# Altium PCB SolarNode.PcbDoc (part 2 of 2)
Units mil, origin at the board's own origin, x right, y up, seen from the top; angles counter-clockwise.
Board outline 7598.43 x 6553.62 mil, 2 copper layers (Top Layer, Bottom Layer); 223 components, 193 nets, 759 pads, 133 vias.
Unrouted connection lines stored in the file: 164.
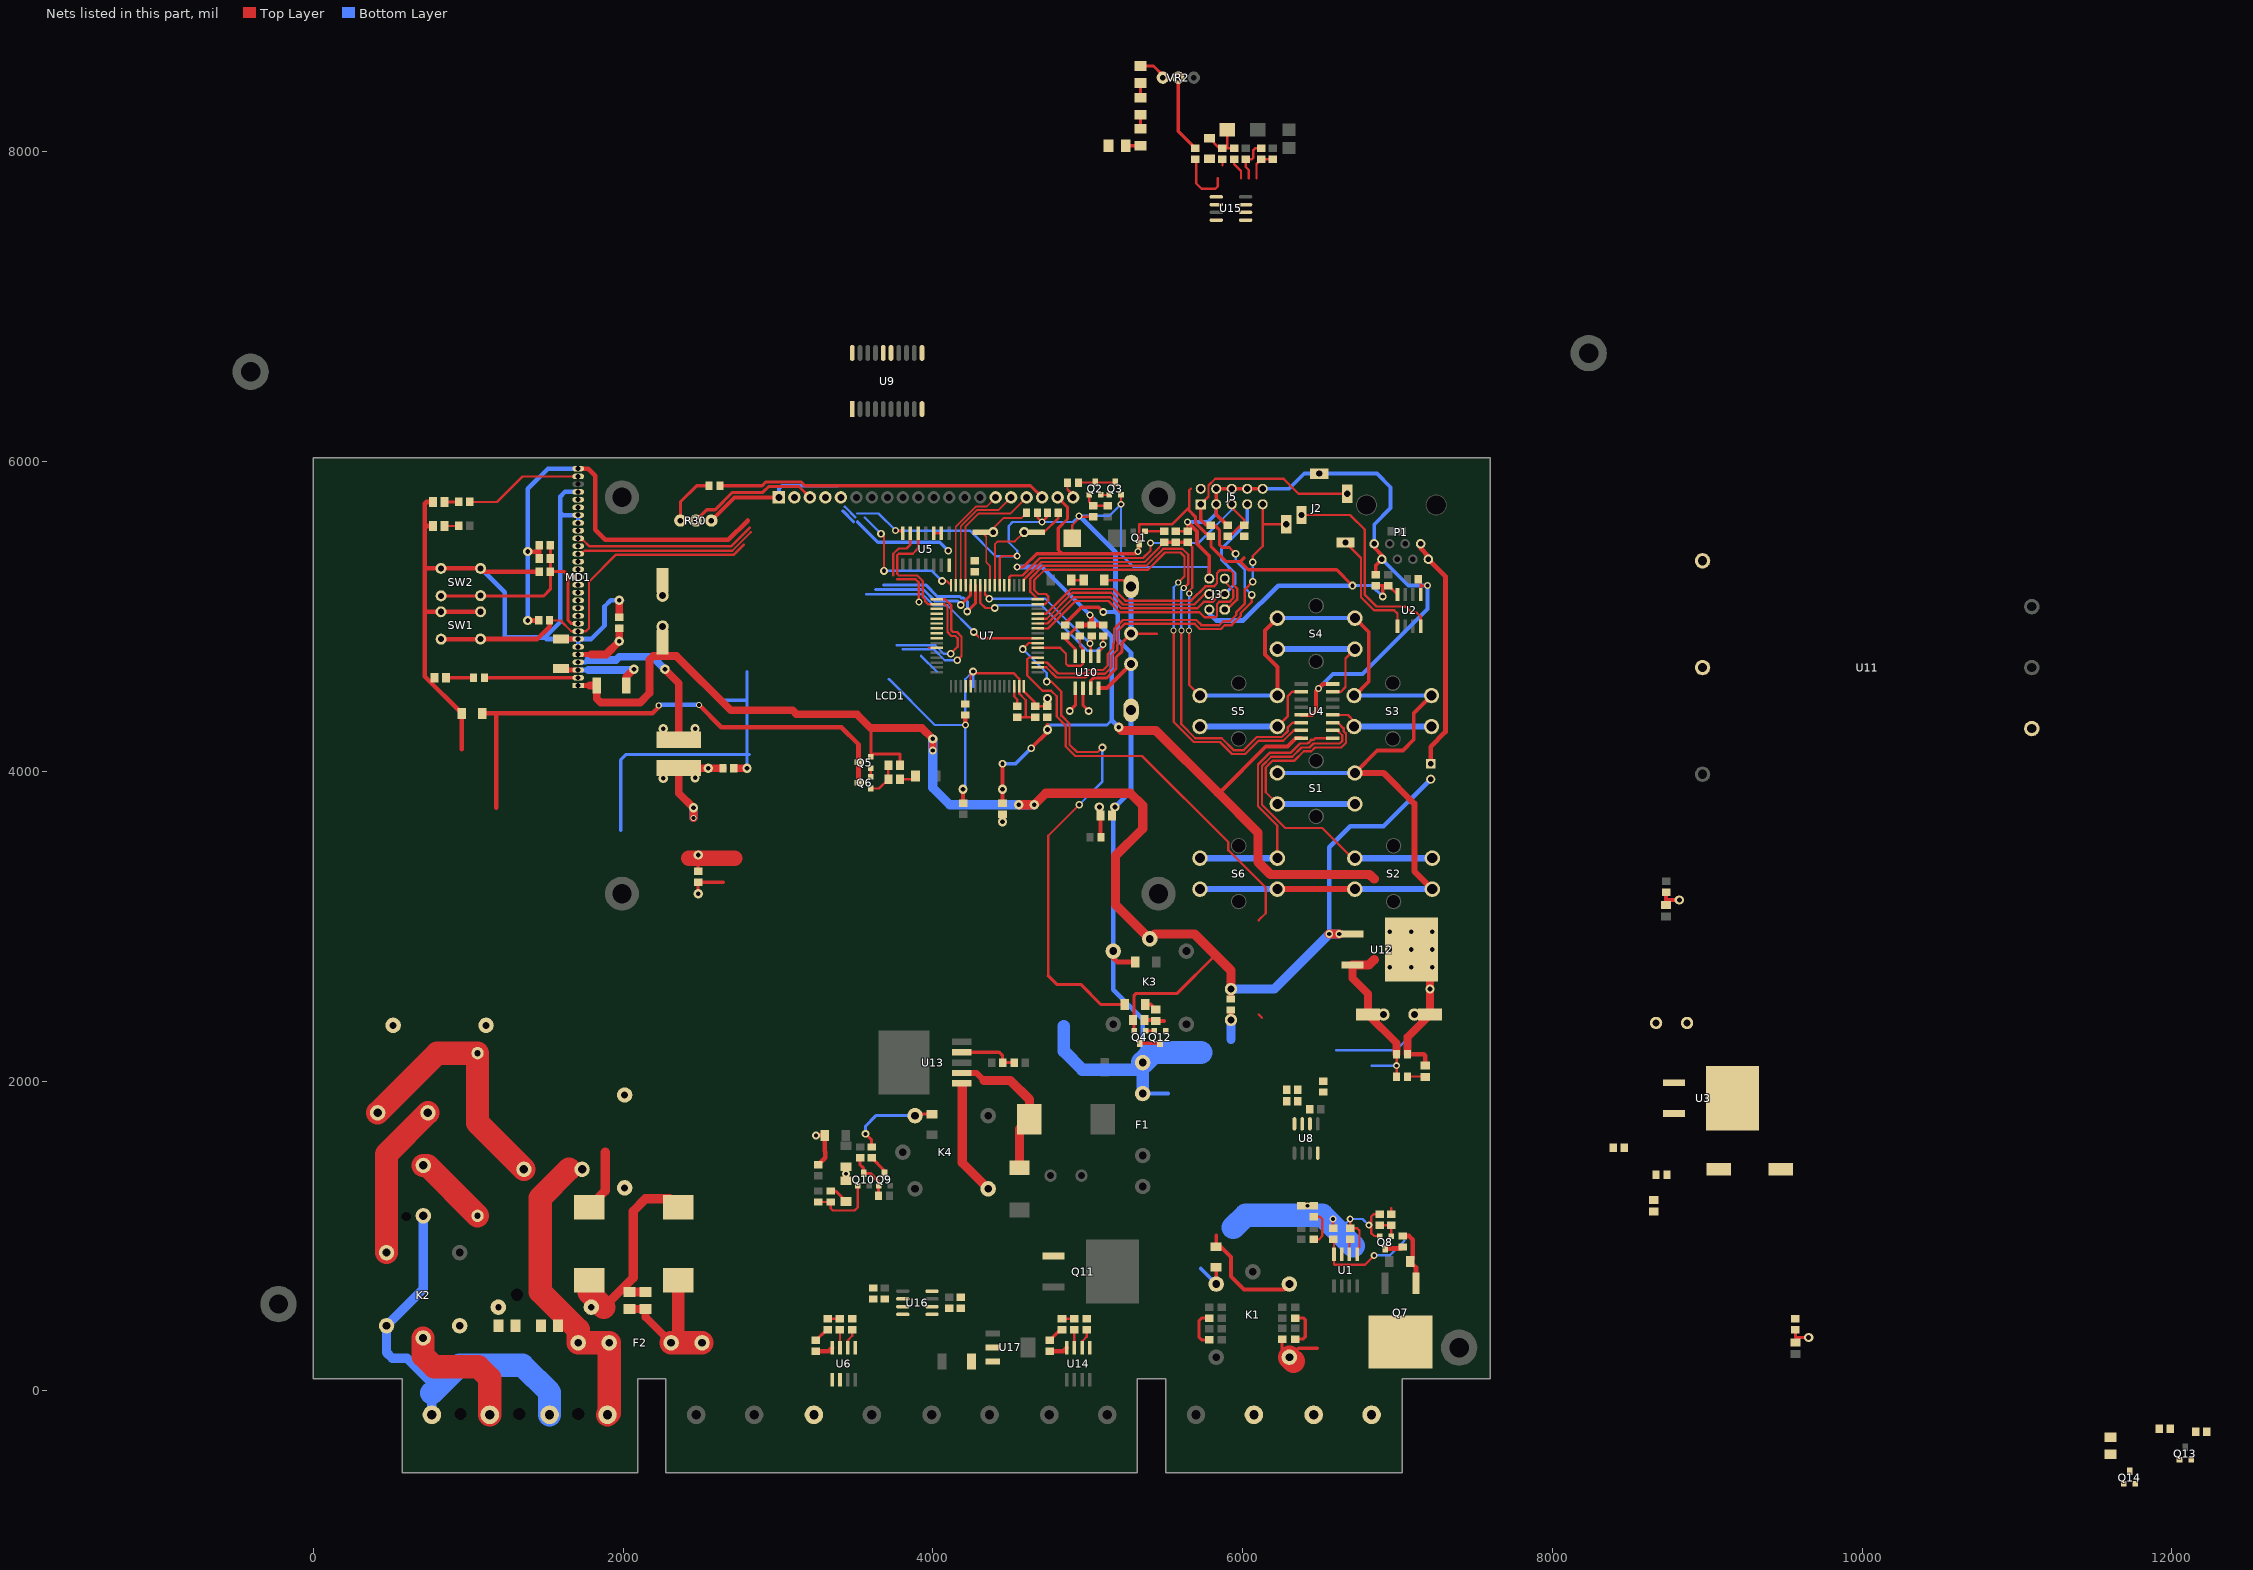
[diagram p2: the nets of this part, all layers, seen from the top]

## Via types
v1: diameter 50, hole 28, Top Layer to Bottom Layer, 38 vias
v2: diameter 60, hole 30, Top Layer to Bottom Layer, 32 vias
v3: diameter 50, hole 25, Top Layer to Bottom Layer, 23 vias
v4: diameter 45, hole 25, Top Layer to Bottom Layer, 22 vias
v5: diameter 40, hole 25, Top Layer to Bottom Layer, 9 vias
v6: diameter 60, hole 32, Top Layer to Bottom Layer, 8 vias
v7: diameter 45, hole 24, Top Layer to Bottom Layer, 1 vias

## Nets (pads, with @x,y where several pads share a name; then routed paths per layer and width w, separated by ;. In a path a pad name is that pad's centre, name@x,y a point inside that pad or via, vN(x,y) a via of type N, cw(c..) or ccw(c..) an arc to the next point about the centre after c; other vN are vias at no path point) (continued)
GND: B1.2 C1.2 C2.2 C4.2 C5.2 C6.2 C10.2 C11.2 C12.2 C13.2 C14.2 C15.2 C16.2 C17.2 C18.2 C20.2 C21.2 C22.1 C23.2 C24.2 C25.1 C26.1 C27.2 C29.2 C35.1 C36.2 C37.2 C38.2 C39.2 C41.2 C42.2 D3.1 D4.1 D5.1 D9.1 F1.1 J2.1 J3.6 J5.3 J5.4 J5.6 J5.8 J5.10 J6.1 J7.2 J8.2 K1.5 K2.4 K3.5 L5.2 L6.2 L9.2 L15.2 LCD1.1 LED1.2 LED2.2 LED3.2 LED5.2 LED6.2 LED8.2 MD1.6 MD1.7 MD1.22 MD1.23 MD1.26 P1.1 P1.2 Q3.2 Q8.2 Q14.3 R6.2 R11.2 R30.1 R32.1 R35.1 R37.2 R48.1 R57.1 R72.2 R76.2 SC1.2 SW1.2 SW1.3 SW2.2 SW2.3 U1.5 U2.5 U3.4 U4.8 U4.13 U5.7 U6.5 U7.22 U7.53 U7.63 U8.8 U9.1 U9.10 U10.4 U11.2 U11.4 U12.4 U14.5 U16.8 | length 33173.9
  Top Layer w15: v4(3760,5554.21) 3787.36,5554.21 U5.7@3805,5536.57 ; U7.53@4243.42,4550.46 4243.42,4627.63 v1(4260,4644.21) 4270,4634.21 4520,4634.21 4557.42,4596.79 U7.63@4557.42,4550.46 4557.42,4501.79 4600,4459.21 4600,4349.21 ; U7.22@4431.42,5201.46 4431.42,5375.63 4445.79,5390 4544.21,5390 v4(4545,5389.21) ; C21.2@4545,4348.78 4659.64,4348.78 C22.1@4660,4349.13 ; C26.1@4675.87,5669.57 4675.87,5638.7 v4(4705,5609.57) 4740,5644.57 C25.1@4740,5669.57 ; C13.2@4900,5504.57 4900,5589.57 4954.57,5644.13 R35.1@5035,5644.13 ; v4(5215,5724.57) Q3.2@5215,5784.57 ; R32.1@5570,5549.57 C14.2@5645,5549.57 v4(5645,5609.57) ; v4(6695,1109.21) C2.2@6695,1049.65 6739.57,1049.65 6755,1034.21 6755,929.21 6740,914.21 U1.5@6740,881.57 ; Q8.2@6885,999.21 6850,999.21 6830,1019.21 6830,1124.21 6845.43,1139.65 R57.1@6885,1139.65 ; R72.2@7135.43,5239.21 7150,5224.65 7150,5199.21 ; U2.5@7150,5141.57 7150,5199.21 ; v4(7195,5199.21) 7150,5199.21
  Top Layer w20: C16.2@3245.2,325.43 3314.33,394.57 R37.2@3320.2,394.57 ; C18.2@4754.21,325.43 4823.35,394.57 R76.2@4834.21,394.57 ; C4.2@6380,1194.65 R6.2@6460,1194.65 ; C1.2@6585,1049.65 v4(6585,1109.21)
  Top Layer w25: R30.1@2570,5619.21 2719.88,5769.1 LCD1.1@3006.02,5769.1 ; L15.2@4195,3794.65 v2(4195,3884.21) ; C27.2@4855,4944.65 4855,4954.21 4960,5059.21 5070,5059.21 v1(5100,5029.21) ; U10.4@5070,4537.21 5124.49,4537.21 SC1.2@5280,4692.72 ; F1.1@5355,1919.21 F1.1@5363.07,1927.28 ; v4(5645,5609.57) 5705,5549.57 5705,5469.21 5785,5389.21 J3.6@5785,5244.21 ; K1.5@5830,689.21 D4.1@5830,797.28 ; C20.2@5905,5589.65 5899.57,5589.65 5830,5659.21 J5.3@5830,5724.21 J5.4@5830,5824.21 J5.6@5930,5824.21 J5.8@6030,5824.21 J5.10@6130,5824.21 ; U4.13@6377.64,4364.21 6450,4364.21 6475,4389.21 6475,4519.21 v4(6490,4534.21) 6520,4564.21 U4.8@6582.36,4564.21 ; P1.1@6850,5469.21 6850,5444.21 6900,5394.21 P1.2@6900,5369.21 6860,5329.21 C10.2@6860,5269.65
  Top Layer w30: 720,5584.21 LED3.2@772.6,5584.21 ; 721,5030.21 SW1.3@824,5030.21 SW1.2@1080,5030.21 ; 724,5310.21 SW2.3@824,5310.21 SW2.2@1080,5310.21 1101,5289.21 C29.2@1459.57,5289.21 ; LED2.2@772.6,5739.21 730,5739.21 720,5729.21 720,4612.28 D5.1@958.07,4374.21 958.07,4143.58 ; D3.1@1600,4854.69 1709.53,4854.69 MD1.7@1710,4854.21 ; v4(4210,4299.57) C23.2@4210,4364.13 ; K3.5@5165,2839.21 5165,2794.21 5190,2769.21 D9.1@5308.07,2769.21 ; C36.2@5925,2394.21 C37.2@5925,2458.78 ; C39.2@7065.43,2174.21 7170,2174.21 7180,2164.21 LED6.2@7180,2101.62
  Top Layer w50: L6.2@1975,4994.65 v2(1975,5104.21) ; L5.2@2715.43,4019.21 v2(2800,4019.21) ; C39.2@7065.43,2174.21 7065.43,2284.65 C38.2@7210,2429.21 v2(7210,2594.21) 7210,2728.98 v2(7089.76,2849.21)
  Bottom Layer w15: 3510.99,5664.21 3650,5664.21 v4(3760,5554.21) 4240,5554.21 4405,5389.21 v4(4545,5389.21) 4545,5424.21 4490,5479.21 4490,5584.21 4515.36,5609.57 v4(4705,5609.57) 4905.36,5609.57 v4(4945,5649.21) 5139.64,5649.21 v4(5215,5724.57) 5215,5399.21 5295,5319.21 5785,5319.21 ; 3716.42,4595.46 4012.32,4299.57 v4(4210,4299.57) ; v2(4195,3884.21) 4210,3899.21 v4(4210,4299.57) ; 4260,4544.21 v1(4260,4644.21) 4210,4594.21 v4(4210,4299.57) ; 6605,2199.21 6990,2199.21 7215,2424.21 ; 6615,1034.21 6620,1034.21 v4(6695,1109.21) 6775,1109.21 v4(6815,1069.21)
  Bottom Layer w20: v2(1975,5104.21) v2@2000,5104.21 ; 1985,3619.21 1985,4074.21 2020,4109.21 2800,4109.21 ; 2645,4459.21 2800,4459.21 ; v2(2800,4019.21) 2800,4109.21 ; 2800,4644.21 2800,4459.21 ; 2815,4109.21 2800,4109.21 ; 2800,4109.21 2800,4459.21
  Bottom Layer w25: LCD1.1@3006.02,5769.1 3006.02,5825.24 3025,5844.21 3385,5844.21 ; v1(5100,5029.21) 5180,5029.21 ; F1.1@5355,1919.21 5520,1919.21 ; v4(5645,5609.57) 5775.36,5609.57 5830,5664.21 J5.3@5830,5724.21 ; 5730,789.21 K1.5@5830,689.21 ; J3.6@5785,5244.21 5785,5319.21 ; J5.10@6130,5824.21 6300,5824.21 6398.07,5922.28 J2.1@6495,5922.28 6866.93,5922.28 6955,5834.21 6955,5699.21 6850,5594.21 P1.1@6850,5469.21 ; v4(6490,4534.21) 6585,4629.21 6775,4629.21 7195,5049.21 v4(7195,5199.21) 7070,5199.21 P1.2@6900,5369.21
  Bottom Layer w30: SW2.2@1080,5310.21 1235,5155.21 1235,4864.21 1495,4864.21 ; MD1.6@1710,4804.21 MD1.7@1710,4854.21 ; MD1.22@1710,5604.21 MD1.23@1710,5654.21 1610,5654.21 1595,5669.21 ; MD1.26@1710,5804.21 1625,5804.21 1595,5774.21 1595,5669.21 ; v2(1975,5104.21) 1920,5104.21 1880,5064.21 1880,4939.21 1795,4854.21 MD1.7@1710,4854.21 ; v4(4945,5649.21) 5180,5414.21 5180,5029.21 5195,5014.21 5195,4849.21 5280,4764.21 SC1.2@5280,4692.72 B1.2@5280,4394.57 5280,3874.21 v6(5175,3769.21) 5165,3759.21 K3.5@5165,2839.21 5165,2589.21 5355,2399.21 F1.1@5355,2119.21 ; 1495,4864.21 1505,4854.21 MD1.7@1710,4854.21 ; 1495,4864.21 1595,4964.21 1595,5669.21
  Bottom Layer w60: L9.2@695,1120 710,1105 710,657.44 K2.4@472.56,420 472.56,247.44 510,210 605,210 765.2,49.8 765.2,-14.8 J7.2@765.2,-155 ; 5925,2269.21 C36.2@5925,2394.21 ; 6130,1134.21 6135,1139.21
  Bottom Layer w80: 4845.98,2355.51 4845.98,2193.23 4965,2074.21 5310,2074.21 F1.1@5355,2119.21 F1.1@5355,1919.21
  Bottom Layer w150: 765.2,-14.8 945,165 1350,165 1525.2,-10.2 J6.1@1525.2,-155 ; F1.1@5355,2119.21 5420,2184.21 5730,2184.21 ; 5940,1054.21 6020,1134.21 6130,1134.21 6515,1134.21 6615,1034.21 6715,934.21
  other v2: 6950,2734.21 7089.76,2734.21 7225,2734.21 6950,2849.21 7225,2849.21 6950,2964.21 7089.76,2964.21 7225,2964.21
  other v4: 6420,1194.65
IO_0: MD1.10
IO_1: MD1.11
IO_2: MD1.12
IO_3: MD1.13
IO_4: MD1.14
IO_5: MD1.15
IO_6: MD1.16
IO_7: MD1.17
IO_8: MD1.18 U7.28 | length 1914.3
  Top Layer w15: MD1.18@1710,5416.71 1743.03,5416.71 1750.53,5424.21 2705,5424.21 2825,5544.21
  Top Layer w20: v1(4180,5074.21) 4243.42,5137.63 U7.28@4243.42,5201.46
  Bottom Layer w20: 3631.36,5174.21 3940,5174.21 4015,5099.21 4160,5099.21 4180,5079.21 v1(4180,5074.21)
IO_9: MD1.19
IO_10: MD1.20 U7.27 | length 2018.4
  Top Layer w15: MD1.20@1710,5491.71 1743.03,5491.71 1780.53,5454.21 2699.64,5454.21 2819.64,5574.21
  Top Layer w20: v1(4222.43,5031.79) 4274.42,5083.78 U7.27@4274.42,5201.46
  Bottom Layer w20: 3681,5204.21 3953.84,5204.21 4028.84,5129.21 4173.84,5129.21 4183.84,5119.21 4198.64,5119.21 4225,5092.85 4225,5034.36 v1(4222.43,5031.79)
IO_11: MD1.21
LCD_CS1: LCD1.15 U7.31 | length 714.7
  Top Layer w12: U7.31@4148.42,5201.46 4148.42,5580.3 4277.69,5709.57 4346.57,5709.57 LCD1.15@4406.1,5769.1
LCD_CS2: LCD1.16 U7.30 | length 783.2
  Top Layer w12: U7.30@4180.42,5201.46 4180.42,5581.19 4286.8,5687.57 4424.57,5687.57 LCD1.16@4506.1,5769.1
LCD_RS: U7.32 | length 966.6
  Top Layer w15: v1(3665,5534.21) 3685,5514.21 v1(3685,5294.21) ; v1(4060,5229.21) 4089.67,5229.21 U7.32@4117.42,5201.46
  Bottom Layer w15: 3430.63,5709.21 3500.63,5639.21 ; 3560,5639.21 v1(3665,5534.21) ; v1(3685,5294.21) 3995,5294.21 v1(4060,5229.21)
LCD_RST: LCD1.17 U7.29 | length 852.2
  Top Layer w12: U7.29@4211.42,5201.46 4211.42,5581.08 4295.91,5665.57 4502.57,5665.57 LCD1.17@4606.1,5769.1
MCU_RST: C20.1 J5.5 R36.1 U7.20 | length 1999.5
  Top Layer w15: U7.20@4494.42,5201.46 4494.42,5253.99 4505,5264.57 4578.93,5264.57 4691.43,5377.07 5357.5,5377.07 5405,5424.57 v4(5405,5474.21) ; C20.1@5905,5518.78 5919.57,5518.78 5990.43,5589.65 R36.1@6010,5589.65 6010,5624.21 5930,5704.21 J5.5@5930,5724.21
  Bottom Layer w15: v4(5405,5474.21) 5715,5474.21 5930,5689.21
MCU_SS: J3.5 U7.10 | length 1621.9
  Top Layer w15: U7.10@4678.42,4922.46 4743.25,4922.46 4920.36,5099.57 5135,5099.57 5207.5,5027.07 5722.14,5027.07 5755,4994.21 5824.64,4994.21 5835,5004.57 5835,5079.21 5850,5094.21 5915,5094.21 5940,5119.21 5940,5169.21 5885,5224.21 J3.5@5885,5244.21
MISO: J3.1 U7.13 | length 1775.2
  Top Layer w15: U7.13@4678.42,5016.46 4731.18,5016.46 4892.42,5177.7 5166.87,5177.7 5242.5,5102.07 5667.86,5102.07 5760,5194.21 5815,5194.21 5835,5214.21 5835,5279.21 5855,5299.21 5920,5299.21 5940,5279.21 5940,5204.57 5965,5179.57 5965,5108.86 5900.36,5044.21 J3.1@5885,5044.21
MOSI: J3.4 U7.12 | length 1236.1
  Top Layer w15: U7.12@4678.42,4985.46 4735.54,4985.46 4902.64,5152.57 5152.71,5152.57 5228.21,5077.07 5687.86,5077.07 5756.51,5145.73 5783.49,5145.73 J3.4@5785,5144.21
NetC2_1: C2.1 U1.6 | length 99.3
  Top Layer w15: U1.6@6690,881.57 6690,973.78 C2.1@6695,978.78
NetC7_1: C7.1 D10.2 R13.1 R20.2 | length 307.8
  Top Layer w15: D10.2@5785,8088.78 5851.5,8022.28 5900,8022.28 ; C7.1@5901.57,8141.85 5901.57,8023.86 5900,8022.28 ; R20.2@5945,8022.28 5900,8022.28
NetC17_1: C17.1 U6.6 | length 129.6
  Top Layer w15: U6.6@3450.2,277.36 3450.2,325 3480.2,355 C17.1@3480.2,394.57
NetC21_1: C21.1 U7.62 | length 138.9
  Top Layer w15: U7.62@4525.42,4550.46 4525.42,4483.79 4545,4464.21 C21.1@4545,4419.65
NetC22_2: C22.2 L14.2 U7.64 | length 289.3
  Top Layer w15: U7.64@4588.42,4550.46 4588.42,4515.79 4660,4444.21 C22.2@4660,4420 L14.2@4740,4420 v6(4740,4469.21)
NetC25_2: C25.2 U7.23 Y3.1 Y4.1 | length 703.7
  Top Layer w12: U7.23@4400.42,5201.46 4400.42,5464.99 4420,5484.57 4530,5484.57 Y3.1@4590,5544.57
  Top Layer w15: Y4.1@4665,5544.57 4720,5544.57 4810.87,5635.43 C25.2@4810.87,5669.57
NetC26_2: C26.2 U7.24 Y3.2 Y4.2 | length 646.7
  Top Layer w12: Y4.2@4315,5544.57 4345,5514.57 4345,5349.57 4368.42,5326.15 U7.24@4368.42,5201.46 ; Y3.2@4390,5544.57 4390,5569.57 4455,5634.57 4570,5634.57 C26.2@4605,5669.57
NetC31_2: C31.2 L4.2 L5.1 | length 708.9
  Top Layer w50: L4.2@2360,4021.14 2360,3859.21 v2(2455,3764.21) v5(2455,3699.21) ; L4.2@2361.93,4019.21 v2(2550,4019.21) L5.1@2644.57,4019.21
  Bottom Layer w50: v5(2455,3699.21) v2(2455,3764.21)
  other v2: 2260,3954.21 2465,3959.21
NetC32_1: C32.1 C33.1 L7.2 L8.1 | length 1678.7
  Top Layer w150: L8.1@415,1795 800,2180 C33.1@1060,2180 1060,1730 L7.2@1360,1430
NetC33_2: C33.2 L9.1 | length 484.6
  Top Layer w150: L9.1@710,1455 735,1455 C33.2@1060,1130
NetC34_2: C34.2 C35.2 L10.2 L11.1 R58.1 | length 1362.2
  Top Layer w60: 1875,540 2065,730 2065,1160 2145,1240 2301.22,1240 L10.2@2355,1186.22 ; R58.1@2040.43,638.31 C34.2@2145.43,638.31
  Top Layer w150: L11.1@1780,713.78 1780,635 1875,540
NetC42_1: C42.1 U14.6 | length 129.6
  Top Layer w15: U14.6@4964.21,277.36 4964.21,320 4994.21,350 C42.1@4994.21,394.57
NetD1_1: D1.1 D8.2 | length 88
  Top Layer w15: D8.2@4885.12,5234.57 D1.1@4973.07,5234.57
NetD4_2: D4.2 K1.4 Q4.3 Q12.3 | length 877.9
  Top Layer w25: Q4.3@5337,2244.21 Q12.3@5467,2244.21 ; 5830,1004.21 D4.2@5830,931.14 5858.07,931.14 5925,864.21 5925,739.21 6010,654.21 6267.44,654.21 K1.4@6302.44,689.21
NetD5_2: D5.2 K2.5 Q5.3 Q6.3 | length 3423.5
  Top Layer w30: D5.2@1091.93,4374.21 1180,4374.21 ; 1180,3764.21 1180,4374.21 ; v5(2230,4424.21) 2235,4419.21 2190,4374.21 1180,4374.21 ; v5(2490,4429.21) 2635,4284.21 3410,4284.21 3520,4174.21 Q5.3@3520,4057.21 Q6.3@3520,3927.21
  Bottom Layer w30: v5(2230,4424.21) 2235,4429.21 v5(2490,4429.21)
NetD6_2: D6.2 R50.1 | length 109
  Top Layer w15: R50.1@3787.4,3949.21 3868.07,3949.21 D6.2@3888.07,3969.21
NetD7_1: D7.1 Q7.1 R54.2 | length 378.6
  Top Layer w30: R54.2@7035,999.65 7074.57,999.65 7100,974.21 7100,852.28 D7.1@7081.93,834.21 7120,796.14 Q7.1@7120,694.37
NetD10_1: D10.1 U15.1 | length 7.1
  Top Layer w15: D10.1@5785,7954.92 D10.1@5790,7949.92
NetD11_2: D11.2 R49.1 | length 81.6
  Top Layer w25: D11.2@5371.93,2494.21 5407.4,2494.21 R49.1@5440,2461.61
NetD12_1: D12.1 D14.1 | length 91.1
  Top Layer w20: D12.1@3440,1356.14 D14.1@3440,1447.28
  other v3: 3440,1401.71
NetD12_2: D12.2 R63.2 | length 127.9
  Top Layer w20: R63.2@3340,1289.65 3372.64,1289.65 D12.2@3440,1222.28
NetD13_2: D13.2 U17.3
NetD15_1: D15.1 K4.4 R55.2 | length 603
  Top Layer w20: v3(3565,1659.21) 3605,1619.21 R55.2@3605,1574.65 ; K4.4@3885,1776.65 3894.49,1786.14 D15.1@3985,1786.14
  Bottom Layer w20: v3(3565,1659.21) 3565,1709.21 3632.44,1776.65 K4.4@3885,1776.65
NetD18_1: D18.1 Q11.1 R70.2 | length 267.2
  Top Layer w30: v3(3245,1649.21) D18.1@3303.07,1649.21 3303.07,1546.3 3305.16,1544.21 3305.16,1504.8 R70.2@3260,1459.65
NetD19_2: D19.2 L12.1 U13.2 | length 974.6
  Top Layer w40: U13.2@4186.22,2052.28 4281.93,2052.28 4330,2004.21
  Top Layer w60: 4330,2004.21 4500,2004.21 4623.78,1880.43 L12.1@4623.78,1754.21 4560,1690.43 D19.2@4560,1441.02
NetJ1_2: J1.2 U6.1 U6.2
NetJ5_2: J5.2 R8.2
NetJ7_1: J7.1 K2.1 | length 841.5
  Top Layer w150: K2.1@708.78,341.26 708.78,226.22 780,155 1065,155 1139.21,80.79 J7.1@1139.21,-155
NetJ8_1: J8.1 Q7.4
NetJP1_1: JP1.1 P1.7 P1.8 | length 1525.6
  Top Layer w30: P1.7@7150,5469.21 7150,5439.21 7200,5389.21 P1.8@7200,5369.21 7310,5259.21 7310,4254.21 7215,4159.21 JP1.1@7215,4049.21
NetK4_2: K4.2 U13.1 | length 739.4
  Top Layer w60: U13.1@4190,1974.21 4190,1471.65 K4.2@4357.44,1304.21
NetL1_2: L1.2 R14.2 | length 239
  Top Layer w20: v2(2485,3209.21) L1.2@2485,3283.78 2649.45,3283.78
NetLCD1_20: LCD1.20 R33.2 | length 110.6
  Top Layer w15: R33.2@4869.57,5864.57 4869.57,5820 4906.1,5783.47 LCD1.20@4906.1,5769.1
NetLED1_1: LED1.1 R42.2 | length 177.2
  Top Layer w20: LED1.1@857.4,4604.21 R42.2@1034.57,4604.21
NetLED2_1: LED2.1 R43.2 | length 92.2
  Top Layer w20: LED2.1@847.4,5739.21 R43.2@939.57,5739.21
NetLED3_1: LED3.1 R44.2 | length 92.2
  Top Layer w15: LED3.1@847.4,5584.21 R44.2@939.57,5584.21
NetLED4_1: LED4.1 R53.1 | length 134.6
  Top Layer w20: R53.1@9570,393.78 9570,344.21 v6(9655,344.21)
NetLED5_1: LED5.1 R60.1 | length 141.2
  Top Layer w25: LED5.1@5082.6,3714.21 5082.6,3577.05 R60.1@5085.43,3574.21
  other v6: 5075,3769.21
NetLED6_1: LED6.1 R61.1 | length 115.6
  Top Layer w15: R61.1@7065.43,2029.21 7177.6,2029.21 LED6.1@7180,2026.81
NetLED7_1: LED7.1 R67.1 | length 134.6
  Top Layer w25: R67.1@8735,3218.78 8735,3169.21 v6(8820,3169.21)
NetLED8_1: LED8.1 R7.1
NetQ1_1: Q1.1 R31.2 | length 125.2
  Top Layer w15: Q1.1@5370,5549.57 5494.57,5549.57 R31.2@5495,5550
NetQ2_1: Q2.1 R34.1 R35.2 | length 174.9
  Top Layer w15: Q2.1@5010,5784.57 5010,5740 R35.2@5035,5715 R34.1@5130,5715
NetQ2_2: Q2.2 Q3.1 | length 55
  Top Layer w15: Q2.2@5085,5784.57 Q3.1@5140,5784.57
NetQ2_3: Q2.3 Q3.3 R33.1 | length 237.6
  Top Layer w15: R33.1@4940.43,5864.57 Q2.3@5048,5864.57 Q3.3@5178,5864.57
NetQ4_1: Q4.1 Q12.2 | length 55
  Top Layer w15: Q4.1@5375,2324.21 Q12.2@5430,2324.21
NetQ5_1: Q5.1 Q6.2 | length 55
  Top Layer w15: Q6.2@3600,3964.21 Q5.1@3600,4019.21
NetQ6_1: Q6.1 R50.2 R52.1 | length 227.5
  Top Layer w15: Q6.1@3600,3889.21 3652.6,3889.21 R50.2@3712.6,3949.21 R52.1@3712.6,4039.21
NetQ8_1: Q8.1 R56.2 R57.2 | length 144.6
  Top Layer w15: R57.2@6885,1068.78 R56.2@6960,1068.78 Q8.1@6960,999.21
NetQ8_3: Q8.3 R54.1 | length 117
  Top Layer w30: Q8.3@6922,919.21 7025.43,919.21 R54.1@7035,928.78
NetQ9_1: Q9.1 Q10.3 R62.1 R65.2 | length 319.1
  Top Layer w20: R62.1@3530,1503.78 3530,1459.21 3553,1436.21 Q10.3@3553,1404.21 3595,1404.21 3650,1349.21 Q9.1@3650,1324.21 3650,1259.65 R65.2@3649.57,1259.21
NetQ9_3: Q9.3 R55.1 | length 133.9
  Top Layer w20: R55.1@3605,1503.78 3688,1420.78 Q9.3@3688,1404.21
NetQ10_1: Q10.1 R63.1 R64.2 | length 449.1
  Top Layer w15: R64.2@3260,1218.78 R63.1@3340,1218.78 3340,1179.21 3355,1164.21 3495,1164.21 3515,1184.21 Q10.1@3515,1324.21
NetQ12_1: Q12.1 R49.2 R51.1 | length 128.1
  Top Layer w25: R51.1@5367.4,2394.21 5432.6,2394.21 R49.2@5440,2386.81 5492.4,2386.81
NetQ13_1: Q13.1 Q14.2
NetQ14_1: Q14.1 R27.1
NetR2_2: R2.2 R4.1 | length 252.4
  Top Layer w20: R2.2@5785,328.78 5735.43,328.78 5720,344.21 5720,454.21 5734.57,468.78 R4.1@5785,468.78
NetR5_2: R5.2 R6.1 | length 234.5
  Top Layer w15: R5.2@6460,978.78 6494.57,978.78 6515,999.21 6515,1109.21 6500.43,1123.78 R6.1@6460,1123.78
NetR10_1: R10.1 R11.1 U8.3
NetR10_2: R10.2 U1.7
NetR12_1: R12.1 R16.1 U8.2
NetR13_2: R13.2 R21.1 U15.2 | length 407.2
  Top Layer w15: R21.1@5700,7951.42 5700,7796.85 5735,7761.85 5825,7761.85 5840,7776.85 5840,7829.21 ; 5870,7911.85 R13.2@5870,7951.42
NetR14_1: R14.1 R15.1 | length 94.9
  Top Layer w20: R14.1@5245.12,8039.21 5339.88,8039.21 R15.1@5340,8039.09
NetR15_2: R15.2 R18.2 | length 89.8
  Top Layer w20: R15.2@5340,8149.33 R18.2@5340,8239.09
NetR17_1: R17.1 R37.1 U16.3 | length 80
  Top Layer w15: R37.1@3320.2,465.43 R17.1@3400.2,465.43
NetR17_2: R17.2 U6.7 | length 117.2
  Top Layer w15: U6.7@3400.2,277.36 R17.2@3400.2,394.57
NetR18_1: R18.1 R19.1 | length 94.8
  Top Layer w20: R18.1@5340,8349.33 R19.1@5340,8444.09
NetR19_2: R19.2 VR2.3 | length 184.9
  Top Layer w20: R19.2@5340,8554.33 5424.88,8554.33 5485,8494.21 VR2.3@5485,8479.21
NetR20_1: R20.1 U15.5 | length 140.8
  Top Layer w15: R20.1@5945,7951.42 5945,7921.85 5990,7876.85 5990,7829.21
NetR21_2: R21.2 VR2.2 | length 502.5
  Top Layer w20: VR2.2@5585,8479.21 5585,8132.28 R21.2@5695,8022.28
NetR22_2: R22.2 R23.1 U15.7 | length 209.6
  Top Layer w15: 6090,7829.21 6090,7921.42 R23.1@6120,7951.42 R22.2@6195,7951.42
NetR23_2: R23.2 R24.1 U15.6 | length 289.1
  Top Layer w15: 6040,7829.21 6040,7881.85 6020,7901.85 R24.1@6020,7951.42 6059.57,7951.42 6070,7961.85 6070,8011.85 6080.43,8022.28 R23.2@6120,8022.28
NetR28_2: R28.2 R38.1 | length 250.4
  Top Layer w20: R28.2@6340,333.78 6389.57,333.78 6405,349.21 6405,459.21 6395.43,468.78 R38.1@6340,468.78
NetR29_1: R29.1 R30.3 | length 348.1
  Top Layer w20: R30.3@2370,5619.21 2370,5739.21 2475,5844.21 R29.1@2554.57,5844.21
NetR47_1: R47.1 R48.2
NetR66_1: R66.1 R69.1 U13.4 | length 392.4
  Top Layer w20: U13.4@4186.22,2186.14 4428.07,2186.14 4450.87,2163.35 R69.1@4450.87,2119.21 R66.1@4525,2119.21
NetR73_1: R73.1 R74.1 U16.2
NetR75_1: R75.1 R76.1 U16.5 | length 80
  Top Layer w15: R76.1@4834.21,465.43 R75.1@4914.21,465.43
NetR75_2: R75.2 U14.7 | length 117.2
  Top Layer w15: U14.7@4914.21,277.36 R75.2@4914.21,394.57
NetR77_1: R77.1 R78.1 U16.6
NetS1_1: S1.1 U4.3 | length 1535
  Top Layer w15: S1.1@6225,3789.21 6150,3864.21 6150,4024.21 6195,4069.21 6335,4069.21 6395,4129.21 6443.22,4129.21 6468.22,4154.21 6637.58,4154.21 6668.17,4184.8 6668.17,4243.63 6652.5,4259.3 6652.5,4277.07 6615.36,4314.21 U4.3@6582.36,4314.21
  Bottom Layer w40: S1.1@6225,3789.21 S1.1@6725,3789.21
NetS2_1: S2.1 U4.2 | length 2189.7
  Top Layer w15: U4.2@6582.36,4264.21 6612.23,4264.21 6643.17,4233.27 6643.17,4195.15 6627.23,4179.21 6457.86,4179.21 6432.86,4154.21 6380.36,4154.21 6320.36,4094.21 6184.64,4094.21 6125,4034.57 6125,3784.21 6275,3634.21 6515,3634.21 6710,3439.21 S2.1@6725,3439.21
  Bottom Layer w40: S2.1@6725,3439.21 S2.1@7225,3439.21
NetS3_1: S3.1 U4.4 | length 692.5
  Top Layer w15: U4.4@6602.36,4364.21 6680,4364.21 ; 6695,4349.21 6680,4364.21 ; S3.1@6725,4289.21 6725,4319.21 6680,4364.21
  Top Layer w40: S3.1@7220,4289.21 S3.1@7225,4289.21
  Bottom Layer w40: S3.1@6720,4289.21 S3.1@7215,4289.21
NetS4_1: S4.1 U4.7 | length 844.9
  Top Layer w15: U4.7@6602.36,4514.21 6635,4514.21 6665,4544.21 6665,4729.21 S4.1@6725,4789.21
  Bottom Layer w40: S4.1@6225,4789.21 S4.1@6725,4789.21
NetS5_1: S5.1 U4.10 | length 822
  Top Layer w15: S5.1@6225,4289.21 6292.5,4356.71 6292.5,4486.71 6320,4514.21 U4.10@6377.64,4514.21
  Bottom Layer w40: S5.1@5725,4289.21 S5.1@6225,4289.21
NetS6_1: S6.1 U4.1 | length 1711.9
  Top Layer w15: S6.1@6225,3439.21 6225,3648.86 6100,3773.86 6100,4044.92 6174.29,4119.21 6310,4119.21 6370,4179.21 6419.29,4179.21 6424.98,4184.9 6428.19,4184.9 6438.44,4195.15 6438.44,4198.37 6444.29,4204.21 6459.29,4204.21 6469.29,4214.21 U4.1@6582.36,4214.21
  Bottom Layer w40: S6.1@5725,3439.21 S6.1@6225,3439.21
NetU5_2: U5.2 U5.3 | length 50
  Top Layer w15: U5.3@4005,5536.57 U5.2@4055,5536.57
NetU10_1: U10.1 Y5.1 | length 162.6
  Top Layer w20: Y5.1@4883.98,4389.57 4920,4425.59 U10.1@4920,4537.21
NetU10_2: U10.2 Y5.2 | length 162.6
  Top Layer w20: U10.2@4970,4537.21 4970,4425.59 Y5.2@5006.02,4389.57
PDI: J2.2 J5.1 R25.2 U7.2 | length 3684.3
  Top Layer w15: U7.2@4678.42,4671.46 4732.4,4671.46 4797.73,4606.12 4987.98,4606.12 5011.07,4629.21 5110.36,4629.21 5155,4673.86 5155,4747.29 5190,4782.29 5190,4813.86 5195.06,4818.92 5195.06,4908.56 5238.57,4952.07 5691.08,4952.07 5723.93,4919.21 5860.36,4919.21 5885.36,4944.21 5929.21,4944.21 5987.68,5002.68 5987.68,5021.53 6060,5093.86 v1(6060,5139.21) ; J5.1@5730,5724.21 5780,5774.21 5780,5844.92 5824.29,5889.21 6265,5889.21 6361.85,5792.36 J2.2@6676.1,5792.36 ; 5915,5444.21 v1(5955,5404.21)
  Top Layer w20: J5.1@5730,5724.21 5730,5624.65 5765,5589.65 R25.2@5795,5589.65 5819.57,5589.65 5850,5559.21 5850,5464.21 5870,5444.21 5915,5444.21
  Bottom Layer w15: v1(5955,5404.21) 5955,5359.21 6015,5299.21 6015,5184.21 v1(6060,5139.21)
PDO: J2.4 J5.9 U7.3 | length 2544.8
  Top Layer w15: U7.3@4678.42,4702.46 4736.75,4702.46 4808.09,4631.12 4977.62,4631.12 5000.71,4654.21 5100,4654.21 5130,4684.21 5130,4757.64 5165,4792.64 5165,4824.21 5170.06,4829.27 5170.06,4918.92 5228.21,4977.07 5701.43,4977.07 5734.29,4944.21 5850,4944.21 5875,4969.21 5918.85,4969.21 5960,5010.36 5960,5029.21 6015,5084.21 6015,5174.21 v1(6065,5224.21) ; v1(6065,5349.21) 6065.07,5349.29 6065.07,5389.29 6130,5454.21 J5.9@6130,5724.21 ; 6131.3,5595.51 J2.4@6282.4,5595.51
  Bottom Layer w15: v1(6065,5224.21) v1(6065,5349.21)
PHASE: C32.2 F2.1 J6.2 L7.1 R47.2 | length 1967.6
  Top Layer w150: 1650,1430 1465,1245 1465,640 1710,395 F2.1@1710,310 F2.1@1910,310 1910,-144.21 J6.2@1899.21,-155
PHASE_FIR1: L1.1 L11.2 U11.3 | length 776.8
  Top Layer w20: L1.1@2485,3354.65 v2@2485,3438.19
  Top Layer w60: L11.2@1780,1186.22 1885,1291.22 1885,1540
  Top Layer w100: 2423.98,3438.19 2720,3438.19
  other v2: 2485,3459.21
PHASE_FIR2: K2.3 L8.2 | length 1013.3
  Top Layer w150: K2.3@472.56,892.44 472.56,1527.56 L8.2@740,1795
PHASE_FUS: C31.1 C34.1 F2.2 L10.1 R58.2 | length 1013.7
  Top Layer w50: R58.2@2040.43,528.07 C34.1@2145.43,528.07 2145.43,474.57 F2.2@2310,310
  Top Layer w80: F2.2@2310,310 2355,355 L10.1@2355,713.78
  Top Layer w150: F2.2@2310,310 F2.2@2510,310
PKD: MD1.28 R43.1 | length 767.9
  Top Layer w15: R43.1@1010.43,5739.21 1185,5739.21 1350,5904.21 MD1.28@1710,5904.21
PL_RST-: C28.1 C29.1 MD1.9 R46.2 SW2.1 SW2.4 | length 1495.4
  Top Layer w20: SW2.4@825,5133.21 1489,5133.21 1530.43,5174.65 C29.1@1530.43,5289.21 ; C28.1@1530.43,5459.21 R46.2@1530.43,5374.21 C29.1@1530.43,5289.21 ; MD1.9@1710,4954.21 1665,4954.21 1645,4974.21 1645,5264.21 1620,5289.21 C29.1@1530.43,5289.21
PL_SVC-: MD1.8 R45.2 SW1.1 SW1.4 U7.8 | length 3691.7
  Top Layer w15: R45.2@1525.43,4974.21 1595,4974.21 1665,4904.21 MD1.8@1710,4904.21 1760,4904.21 1780,4924.21 1780,5224.21 1955,5399.21 2715.36,5399.21 2780.36,5464.21 ; v1(4265,4899.21) 4304.75,4859.46 U7.8@4678.42,4859.46
  Top Layer w30: SW1.4@825,4853.21 1079,4853.21 SW1.1@1080,4854.21 1445,4854.21 1525.43,4934.65 R45.2@1525.43,4974.21
  Bottom Layer w15: 3570,5144.21 3931.11,5144.21 4003.61,5071.71 4092.5,5071.71 v1(4265,4899.21)
RAM_A3: LCD1.5 U9.16
RAM_A4: LCD1.4 U9.15
RAM_A8: U7.35
RAM_A9: U7.36
RAM_A10: U7.37
RAM_A11: U7.38
RAM_A12: U7.39
RAM_A13: U7.40
RAM_A14: U7.41
RAM_ALE: U7.43 U9.11 | length 54.7
  Top Layer w12: 3971.75,4797.46 U7.43@4026.42,4797.46
RAM_RD: R9.1 U5.5 U7.34 | length 1571.6
  Top Layer w15: 3770,5274.21 3770,5394.21 3780,5404.21 3870,5404.21 3905,5439.21 U5.5@3905,5536.57 ; 3780,5264.21 3900,5264.21 3935,5229.21 3935,5125.78 3950,5110.78 3950,5099.21 3969.75,5079.46 U7.34@4026.42,5079.46 4075,5079.46 4095,5059.46 4095,4898.86 4119.64,4874.21 4145,4874.21 4160,4859.21 4160,4804.21 v1(4115,4759.21)
  Bottom Layer w15: 3765,4814.21 4015,4814.21 4070,4759.21 v1(4115,4759.21)
RAM_WR: R9.2 U5.6 U7.33 | length 1520.8
  Top Layer w15: 3745,5263.86 3745,5404.57 3779.64,5439.21 3830,5439.21 3855,5464.21 U5.6@3855,5536.57 ; 3769.64,5239.21 3889.64,5239.21 3910,5218.86 v4(3910,5094.21) ; U7.33@4026.42,5111.46 4078.36,5111.46 4120,5069.82 4120,4909.21 4130,4899.21 4155.36,4899.21 4185,4869.57 4185,4744.36 v1(4157.43,4716.79)
  Bottom Layer w15: 3805,4789.21 4004.64,4789.21 4077.14,4716.71 4157.35,4716.71 v1(4157.43,4716.79)
RXCOMP: L6.1 MD1.5 | length 384.8
  Top Layer w30: MD1.5@1710,4754.21 1795,4754.21
  Top Layer w50: 1795,4754.21 1890,4754.21 v2(1975,4839.21) L6.1@1975,4923.78
RXIN: C30.2 L4.1 MD1.4 | length 1099.9
  Top Layer w50: C30.2@2270,4659.21 2360,4569.21 L4.1@2360,4204.21
  Bottom Layer w30: MD1.4@1710,4704.21 1760,4704.21 1775,4719.21
  Bottom Layer w50: 1775,4719.21 1955,4719.21 1975,4739.21 2190,4739.21 C30.2@2270,4659.21
  other v2: 2260,4274.21 2465,4274.21
SCK: J3.3 J5.7 U7.11 | length 2056.1
  Top Layer w15: U7.11@4678.42,4954.46 4739.89,4954.46 4910,5124.57 5145.36,5124.57 5217.86,5052.07 5707.86,5052.07 5750,5094.21 5805.71,5094.21 5835,5123.5 5835,5124.21 5855,5144.21 J3.3@5885,5144.21
  Bottom Layer w20: J3.3@5885,5144.21 5950,5209.21 5950,5279.21 5865,5364.21 5865,5439.21 6030,5604.21 J5.7@6030,5724.21
SCL: R40.1 U7.25 U10.6 | length 986.5
  Top Layer w15: U7.25@4337.42,5201.46 4337.42,5141.79 v1(4365,5114.21) ; v4@5017.5,4822.07 5025,4829.57 R40.1@5025,4874.13 ; U10.6@5020,4741.93 v4@5020,4804.57
  Bottom Layer w15: v1(4365,5114.21) 4725.36,5114.21 v4(5015,4824.57)
SDA: R41.1 U7.26 U10.5 | length 1194.5
  Top Layer w15: U7.26@4305.42,5201.46 4305.42,5088.94 4340.15,5054.21 v1(4400,5054.21) ; U10.5@5070,4741.93 5070,4769.57 v4@5102.32,4801.89 ; v4(5100,4819.57) R41.1@5100,4874.13
  Bottom Layer w15: v1(4400,5054.21) 4417.5,5071.71 4702.5,5071.71 4995,4779.21 5059.64,4779.21 v4(5100,4819.57)
SEL_SOURCE: D11.1 U7.7 | length 3309.1
  Top Layer w15: v1(4580,4789.21) 4619.25,4828.46 U7.7@4678.42,4828.46 ; v1(4735,4579.21) 4765,4579.21 4830,4514.21 4830,4359.57 4882.5,4307.07 4882.5,4172.07 4930.36,4124.21 5065,4124.21 v1(5095,4154.21) ; 4745,2679.21 4745,3584.21 v1(4945,3784.21)
  Top Layer w20: 4745,2679.21 4800,2624.21 4955,2624.21 5085,2494.21 D11.1@5238.07,2494.21
  Bottom Layer w15: v1(4580,4789.21) 4735,4634.21 v1(4735,4579.21) ; v1(4945,3784.21) 5095,3934.21 v1(5095,4154.21)
SW_LAMP: R56.1 U7.4 | length 2766.4
  Top Layer w15: U7.4@4678.42,4734.46 4620.25,4734.46 4610,4724.21 4610,4619.21 4710,4519.21 4765,4519.21 4800,4484.21 4800,4354.21 4857.5,4296.71 4857.5,4161.71 4920,4099.21 5351.42,4099.21 5907.5,3543.13 5907.5,3491.25 6149.29,3249.46 6149.29,3083.5 6105,3039.21 ; 6105,2429.21 6125,2409.21 ; R56.1@6960,1139.65 6960,1179.21
SW_SCAN1: C14.1 R31.1 R32.2 S1.2 S2.2 S3.2 S4.2 S5.2 S6.2 U7.17 | length 8736.2
  Top Layer w15: U7.17@4588.42,5201.46 4588.42,5238.7 4701.79,5352.07 5367.86,5352.07 5427.68,5411.89 5494.92,5479.13 R31.1@5495,5479.13 ; C14.1@5645,5478.7 5675,5448.7 5675,5185.47 5655.71,5166.18 v5(5655.71,5148.5) ; v5(5655,4909.21) 5655,4559.21 S5.2@5725,4489.21
  Top Layer w25: R31.1@5495,5479.13 5644.57,5479.13 C14.1@5645,5478.7 ; S5.2@6225,4489.21 6225,4674.21 6145,4754.21 6145,4909.21 S4.2@6225,4989.21 ; S1.2@6725,3989.21 6870,4134.21 7035,4134.21 7105,4204.21 7105,4374.21 S3.2@7220,4489.21 ; S3.2@6725,4489.21 6815,4579.21 6815,4899.21 S4.2@6725,4989.21
  Top Layer w40: S6.2@6225,3239.21 S2.2@6725,3239.21 ; S1.2@6725,3989.21 6910.79,3989.21 7110,3790 7110,3354.21 S2.2@7225,3239.21
  Bottom Layer w15: v5(5655,4909.21) 5655,5147.79 v5(5655.71,5148.5)
  Bottom Layer w25: S5.2@5725,4489.21 S5.2@6225,4489.21 ; S1.2@6225,3989.21 S1.2@6725,3989.21 ; S4.2@6225,4989.21 S4.2@6725,4989.21 ; S3.2@6720,4489.21 S3.2@7215,4489.21
  Bottom Layer w40: S6.2@5725,3239.21 S6.2@6225,3239.21 ; S2.2@6725,3239.21 S2.2@7225,3239.21
SW_SCAN2: U4.14 U7.16 | length 3310.9
  Top Layer w15: U7.16@4678.42,5111.46 4630,5159.88 4630,5244.92 4712.14,5327.07 5378.21,5327.07 5488.72,5437.58 5610.36,5437.58 5650,5397.93 5650,5213.5 v5(5620.36,5183.86) ; v5(5605,4909.21) 5605,4304.21 5695,4214.21 5865,4214.21 5942.32,4136.89 6007.32,4136.89 6092.14,4221.71 6252.96,4221.71 6292.5,4261.25 6292.5,4284.21 6322.5,4314.21 U4.14@6377.64,4314.21
  Bottom Layer w15: v5(5605,4909.21) 5605,5168.5 v5(5620.36,5183.86)
SW_SCAN3: U4.15 U7.15 | length 3398.5
  Top Layer w15: U7.15@4678.42,5079.46 4723.47,5079.46 4745,5100.99 4745,5129.57 4730,5144.57 4680.67,5144.57 4655,5170.24 4655,5234.57 4722.5,5302.07 5388.57,5302.07 5499.08,5412.58 5600,5412.58 5625,5387.58 5625,5259.21 v5(5585,5219.21) ; v5(5555,4909.21) 5555,4318.86 5684.64,4189.21 5854.64,4189.21 5931.97,4111.89 6017.68,4111.89 6102.5,4196.71 6263.31,4196.71 6330.81,4264.21 U4.15@6377.64,4264.21
  Bottom Layer w15: v5(5555,4909.21) 5555,5189.21 v5(5585,5219.21)
SWQ: R39.1 U7.6 U10.7 | length 571.5
  Top Layer w15: U7.6@4678.42,4797.46 4822.11,4797.46 4860,4759.57 4860,4694.57 4873.44,4681.12 4956.91,4681.12 4970,4694.21 U10.7@4970,4741.93 4970,4789.21 4950,4809.21 R39.1@4950,4874.13
TXON: MD1.2 R42.1 | length 604.6
  Top Layer w20: R42.1@1105.43,4604.21 MD1.2@1710,4604.21
TXOUT: C30.1 D2.1 D3.2 MD1.3 | length 601.5
  Top Layer w30: D3.2@1600,4663.74 1609.53,4654.21 MD1.3@1710,4654.21
  Top Layer w50: D2.1@2020.47,4554.21 2020.47,4609.69 C30.1@2070,4659.21
  Bottom Layer w30: MD1.3@1710,4654.21 1775,4654.21
  Bottom Layer w50: 1775,4654.21 2065,4654.21 C30.1@2070,4659.21
VA: C11.1 C12.1 C36.1 C37.1 D2.2 JP1.2 K3.1 MD1.1 Q4.2 Q5.2 R51.2 R52.2 U3.1 U12.1 | length 10280
  Top Layer w20: 3600,4279.21 Q5.2@3600,4094.21 3617.6,4111.81 3787.4,4111.81 R52.2@3787.4,4039.21 ; Q4.2@5300,2324.21 5300,2554.21 5310,2564.21 5575,2564.21 5825,2814.21
  Top Layer w30: MD1.1@1710,4554.21 1785,4554.21 ; C37.1@5925,2529.65 C36.1@5925,2594.21
  Top Layer w50: 1785,4554.21 D2.2@1829.53,4554.21 1829.53,4469.69 1855,4444.21 2110,4444.21 2170,4504.21 2170,4719.21 2195,4744.21 2345,4744.21 2695,4394.21 3095,4394.21 3120,4369.21 3510,4369.21 3600,4279.21 3930,4279.21 v2(4000,4209.21) v1(4000,4134.21)
  Top Layer w60: v2(4555,3784.21) v2(4655,3784.21) 4730,3859.21 5275,3859.21 5355,3779.21 5355,3629.21 5180,3454.21 5180,3139.17 K3.1@5401.22,2917.95 5432.48,2949.21 5690,2949.21 5825,2814.21 5925,2714.21 C36.1@5925,2594.21 ; v1(6560,2949.21) v1(6625,2949.21)
  Bottom Layer w30: v1(6560,2949.21) 6560,3509.21 6695,3644.21 6910,3644.21 JP1.2@7215,3949.21
  Bottom Layer w60: v2(4000,4209.21) 4000,3894.21 4110,3784.21 v2(4555,3784.21) v2(4655,3784.21) ; C36.1@5925,2594.21 6205,2594.21 v1(6560,2949.21) v1(6625,2949.21)
VCC: C1.1 C10.1 C27.1 C28.2 C38.1 C39.1 C41.1 J3.2 L2.2 LCD1.19 MD1.29 Q1.3 R12.2 R25.1 R27.2 R39.2 R40.2 R41.2 R45.1 R46.1 R61.2 R68.1 U1.8 U2.8 U4.16 U5.14 U8.4 U10.8 U12.3 | length 16396.8
  Top Layer w15: Q1.3@5332,5469.57 5332,5596.21 5547,5596.21 5655,5704.21 5655,5814.21 5665,5824.21 ; C1.1@6590,973.78 U1.8@6590,881.57 6590,819.21 6595,814.21 6790,814.21 v4(6850,874.21) ; C39.1@6994.57,2174.21 6995,2173.78 v4(6995,2099.21) R61.2@6995,2029.65
  Top Layer w20: v4(4545,5319.13) 4584.92,5319.13 4670.36,5404.57 4835,5404.57 ; LCD1.19@4806.1,5769.1 4870,5705.2 4870,5629.57 4810,5569.57 4810,5429.57 4835,5404.57 ; U10.8@4920,4741.93 4920,4789.57 4855,4854.57 C27.1@4855,4873.78 4870.18,4873.78 4941.4,4945 R39.2@4950,4945 R39.2@4965,4945 ; Q1.3@5332,5469.57 5332,5426.57 5310,5404.57 4835,5404.57 ; 5655,5704.21 5655,5684.21 5695,5644.21 5695,5605.53 5781.75,5518.78 R25.1@5795,5518.78 5795,5454.21 5895,5354.21 5985,5354.21 ; 6010,5379.21 5985,5354.21 ; v1(6710,5199.21) 6607.5,5301.71 6037.5,5301.71 5985,5354.21 ; C10.1@6860,5198.78 6905,5198.78 ; v1(6905,5129.21) 6905,5198.78 ; U2.8@7000,5141.57 6942.8,5198.78 R68.1@6940,5198.78 6905,5198.78
  Top Layer w25: L2.2@4450,3794.65 v2(4450,3884.21) v1(4450,4049.21) ; v1(4635,4149.21) 4740,4254.21 4740,4299.21 ; 5840,3864.21 5855,3864.21 6150,4159.21 6290,4159.21 6345,4214.21 U4.16@6377.64,4214.21
  Top Layer w30: v2(1385,4974.21) R45.1@1454.57,4974.21 ; v2@1387.5,5416.71 1459.57,5416.71 ; R46.1@1459.57,5374.21 1459.57,5416.71 ; C28.2@1459.57,5459.21 1459.57,5416.71 ; MD1.29@1710,5954.21 1775,5954.21 1820,5909.21 1820,5559.21 1885,5494.21 2680,5494.21 2805,5619.21 ; R39.2@4965,4945 R40.2@5025,4945 ; v4(5015,5009.21) 5025,4999.21 R40.2@5025,4945 ; R41.2@5100,4945 R40.2@5025,4945
  Top Layer w50: U12.3@6709.84,2749.21 6709.84,2664.37 6810,2564.21 C38.1@6810,2429.21 6994.57,2244.65 C39.1@6994.57,2174.21
  Top Layer w60: v2(5200,4284.21) 5220,4264.21 5440,4264.21 5840,3864.21 6100,3604.21 6100,3414.21 6180,3334.21 6820,3334.21 6850,3304.21 ; U12.3@6709.84,2749.21 6815,2749.21 6850,2784.21
  Bottom Layer w15: 3923.75,4745.46 4025,4644.21 ; 6835,2099.21 v4(6995,2099.21) ; v4(6850,874.21) 6950,874.21 7045,969.21
  Bottom Layer w20: 3417.5,5681.71 3487.5,5611.71 ; 3512.5,5611.71 3645,5479.21 4045,5479.21 v1(4100,5424.21) ; 4740,4299.21 5125,4299.21 5155,4329.21 ; v1(6710,5199.21) 6835,5199.21 v1(6905,5129.21)
  Bottom Layer w25: v1(4450,4049.21) 4535,4049.21 v1(4635,4149.21)
  Bottom Layer w30: v2(1385,4974.21) v2(1385,5419.21) 1385,5824.21 1515,5954.21 MD1.29@1710,5954.21 ; v4(4545,5319.13) 4705.08,5319.13 v4(5015,5009.21) 5155,4869.21 5155,4329.21 v2(5200,4284.21) ; J3.2@5785,5044.21 5785,5019.21 5830,4974.21 6005,4974.21 6230,5199.21 v1(6710,5199.21)
  other v4: 5325,5419.57
  other v6: 4740,4269.21
VCC1: C5.1 C6.1 C15.1 C23.1 C24.1 L14.1 LCD1.2 R7.2 R8.1 R36.2 U3.3 U7.21 U7.52 U9.20
VCELL: B1.1 D1.2 Q13.2 SC1.1 U10.3 | length 1205.6
  Top Layer w15: D1.2@5106.93,5234.57 5275,5234.57 B1.1@5315,5194.57 ; SC1.1@5280,4889.57 5280.24,4889.33 5445,4889.33
  Top Layer w20: U10.3@5020,4537.21 5020,4586.71 5035,4601.71 5121.75,4601.71 5182.5,4662.47 5182.5,4735.9 5222.56,4775.96 5222.56,4832.13 SC1.1@5280,4889.57
  Bottom Layer w30: SC1.1@5280,4889.57 B1.1@5280,5194.57
VDD5A: L2.1 U15.4
  other v2: 4450,3674.21
VDD5A1: C16.1 C18.1 R73.2 R77.2 U6.8 U14.8 U16.4 U17.2 | length 233.9
  Top Layer w30: C16.1@3245.2,254.57 3327.4,254.57 U6.8@3350.2,277.36 ; C18.1@4754.21,254.57 4841.42,254.57 U14.8@4864.21,277.36
VEE: LCD1.18 R29.2 | length 2132.5
  Top Layer w20: R29.2@2625.43,5844.21 2897.62,5844.21 2922.62,5869.21 3148.41,5869.21 3173.41,5844.21 4630.99,5844.21 LCD1.18@4706.1,5769.1
VMAIN: J9.2 K1.3 R26.1 R53.2 | length 379.7
  Top Layer w20: R26.1@6255,333.78 6255,264.21 K1.3@6302.44,216.77 6360.32,274.65 6485,274.65
  Top Layer w150: K1.3@6302.44,216.77 K1.3@6328.23,190.98
VO: LCD1.3 R30.2 | length 856.3
  Top Layer w20: R30.2@2470,5619.21 2540,5689.21 2594.04,5689.21 2706.42,5801.6 2902.38,5801.6 2940,5839.21 3135.99,5839.21 LCD1.3@3206.1,5769.1
XIN: MD1.25
XOUT: MD1.24
~RXD0: J2.5 U2.1 | length 755.8
  Top Layer w15: J2.5@6664.29,5477.4 6765,5376.69 6765,5124.21 6850,5039.21 6980,5039.21 7000,5019.21 U2.1@7000,4936.85
~TXD0: J2.3 U2.4 | length 1349
  Top Layer w15: J2.3@6380.83,5654.57 6694.65,5654.57 6790,5559.21 6790,5139.21 6865,5064.21 7054.29,5064.21 7094.29,5024.21 7125,5024.21 7150,4999.21 U2.4@7150,4936.85
pads on no net: K2.2 LCD1.0 P1.BO1 P1.BO2 S1.0 S2.0 S3.0 S4.0 S5.0 S6.0 U4.5 U4.6 U4.9 U4.11 U4.12 U5.1 U5.8 U5.9 U5.10 U5.11 U5.12 U5.13 U7.1 U7.18 U7.19 U7.42 U8.5 U8.6 U8.7 U9.2 U9.3 U9.4 U9.7 U9.8 U9.9 U9.12 U9.13 U9.14 U9.17 U9.18 U9.19 U11.5
copper on no net: | length 149.3
  Top Layer w15: 4026.42,4828.46 v1(4109.25,4828.46)
  Bottom Layer w15: v1(4109.25,4828.46) 4109.25,4894.96

## Keep-outs
Keep-Out Layer:
  the board outline again, w10

## Other copper
Top Layer:
  rectangle net +BAT1_OUT: 3841.18,-185 4176.18,115
  rectangle net NetJ1_2: 3060.67,-185 3395.67,115
  rectangle net +BAT2_IN: 4574.69,-185 4909.69,115
  rectangle net BATTERY24V_IN: 4968.74,-185 5303.74,115
  rectangle net +BAT1_OUT: 4194.69,-185 4529.69,115
  rectangle net +BAT1_OUT: 3455.2,-185 3790.2,115

## Silkscreen, mask and mechanical layers (free items; w line width, h text height)
Top Overlay:
  lines w10: -531.5,6023.62 -531.5,-531.5 8129.92,-531.5 8129.92,6555.12 -531.5,6555.12 ; 129.92,0 129.92,6023.62 ; 354.33,-275.59 354.33,6023.62 ; 3799.21,-787.4 3799.21,6299.21 ; 5725,4619.21 5725,4154.21 6225,4154.21 6225,3654.21 6725,3654.21 6725,4154.21 7225,4154.21 7225,4624.21 6725,4624.21 6725,5124.21 6225,5124.21 6225,4624.21 5730,4624.21 ; 7244.09,0 7244.09,6299.21 ; 7468.5,0 7468.5,6299.21

## Dimensions
0,6023.62 to 7598.43,6023.62 on Top Overlay
7598.43,78.74 to 7598.43,6023.62 on Top Overlay
8129.92,-531.5 to 8129.92,6555.12 on Top Overlay

## Text inside footprints (layer, text, board x,y; h text height)
J3: Top Overlay "6" at 5805,5304.21 h50 r90; Top Overlay "5" at 5905,5304.21 h50 r90; Top Overlay "2" at 5805,4944.21 h50 r90; Top Overlay "1" at 5905,4964.21 h50 r90
P1: Bottom Overlay "1" at 6802.17,5583.34 h50 r180; Bottom Overlay "7" at 7182.45,5570.28 h50 r180
U11: Bottom Overlay "COM" at 10680,4720 h100 r180; Bottom Overlay "+DC" at 10680,5125 h100 r180; Bottom Overlay "-DC" at 10700,4325 h100 r180; Bottom Overlay "L" at 9085,5400 h100 r180; Bottom Overlay "N" at 9080,4705 h100 r180; Bottom Overlay "FG" at 9080,4025 h100 r180